# Altium PCB STM32_DAQ_Control_Board.PcbDoc (part 1 of 2)
Units mm, origin at the board's own origin, x right, y up, seen from the top; angles counter-clockwise.
Board outline 59.56 x 60 mm, 2 copper layers (Top Layer, Bottom Layer); 78 components, 52 nets, 252 pads, 265 vias.
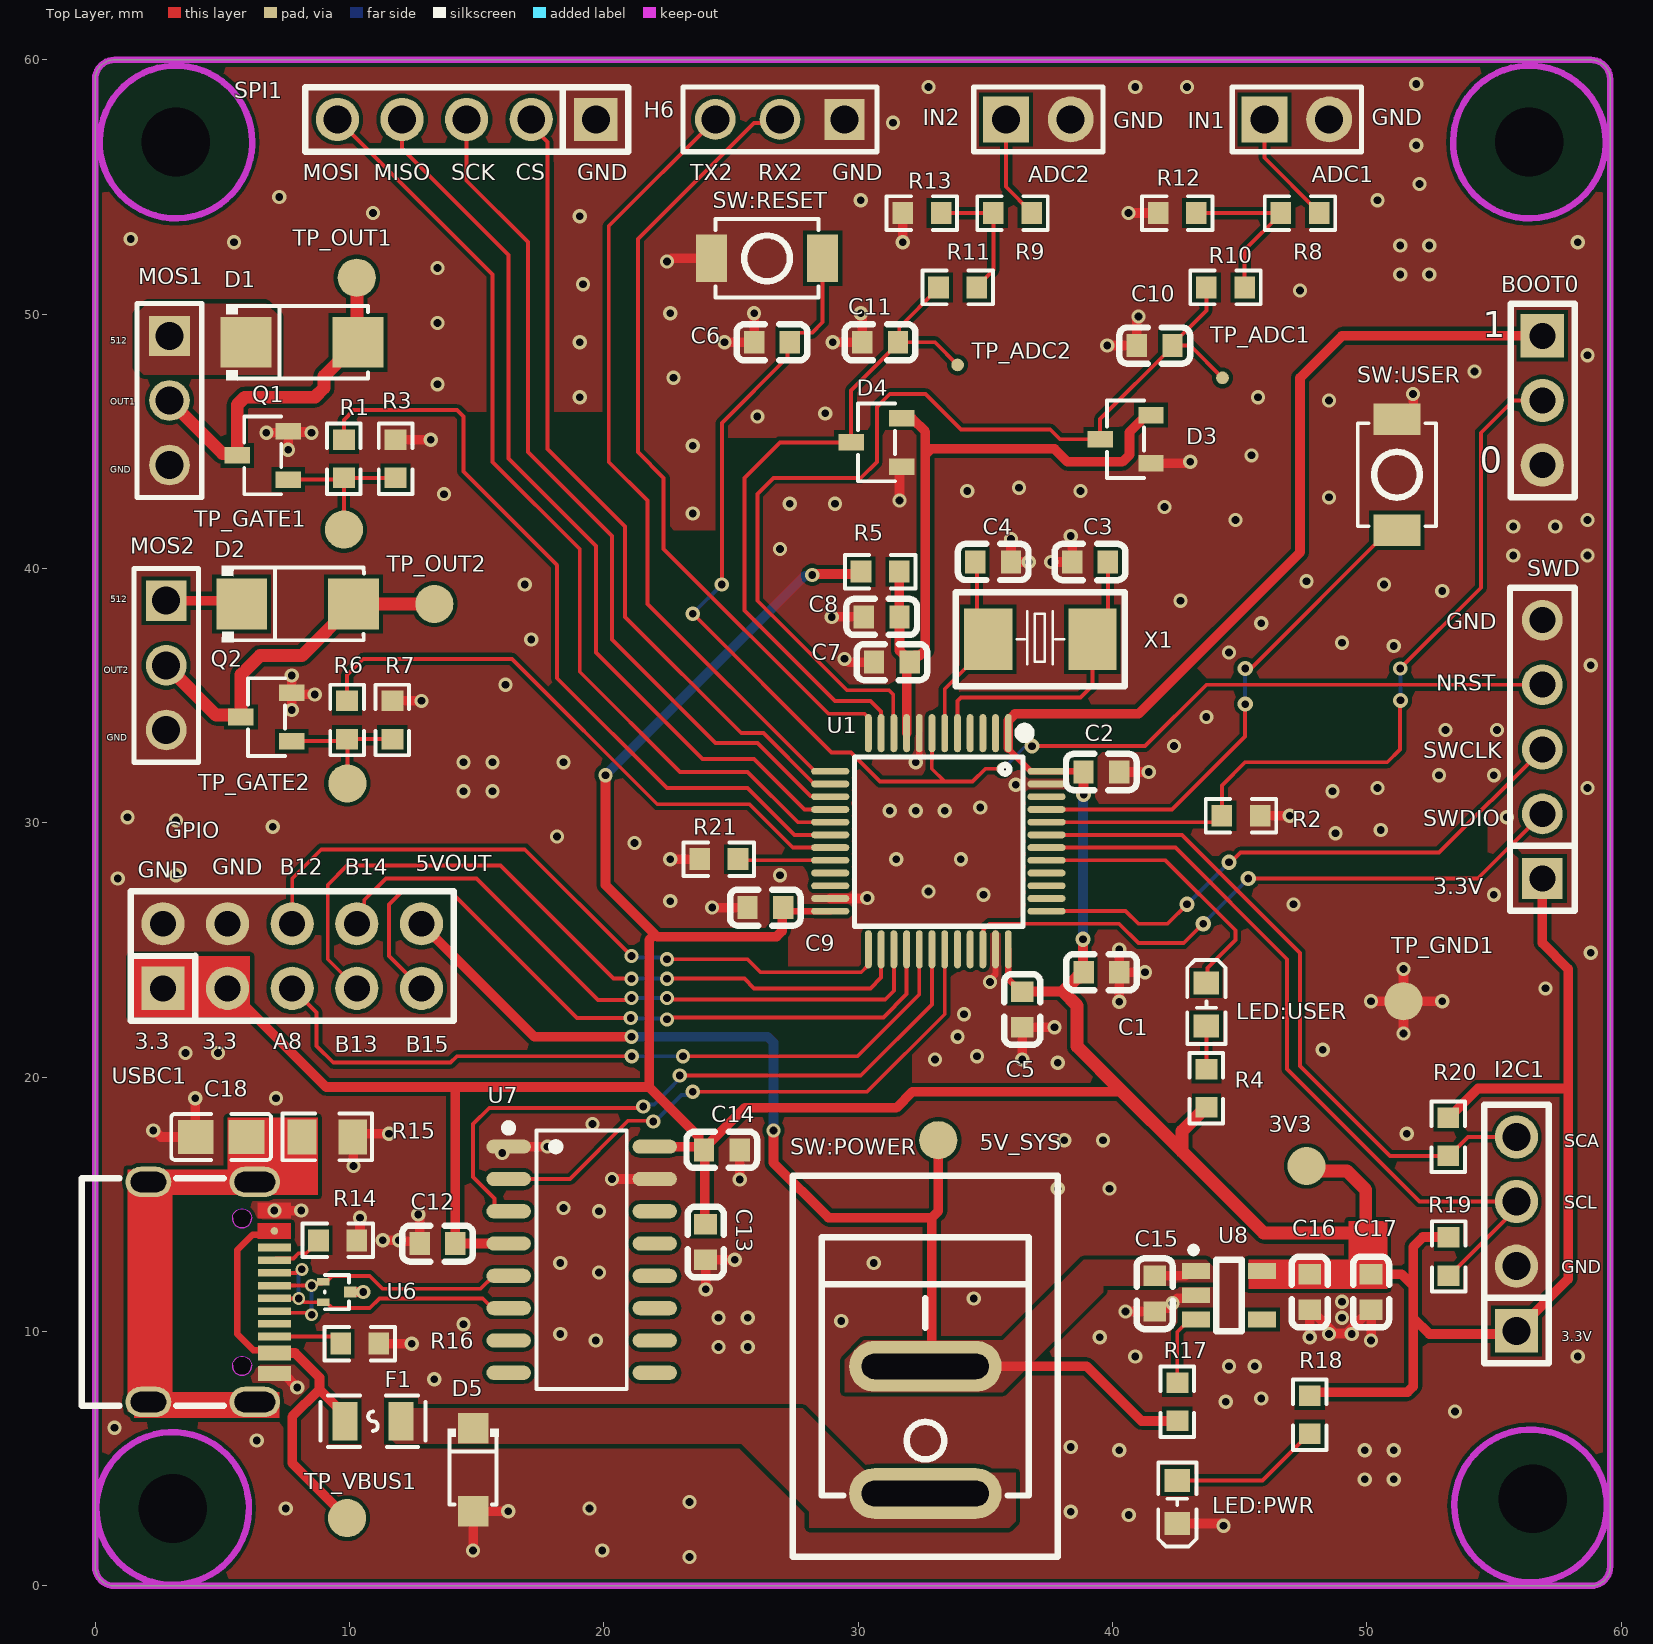
[diagram p0: Top Layer view]
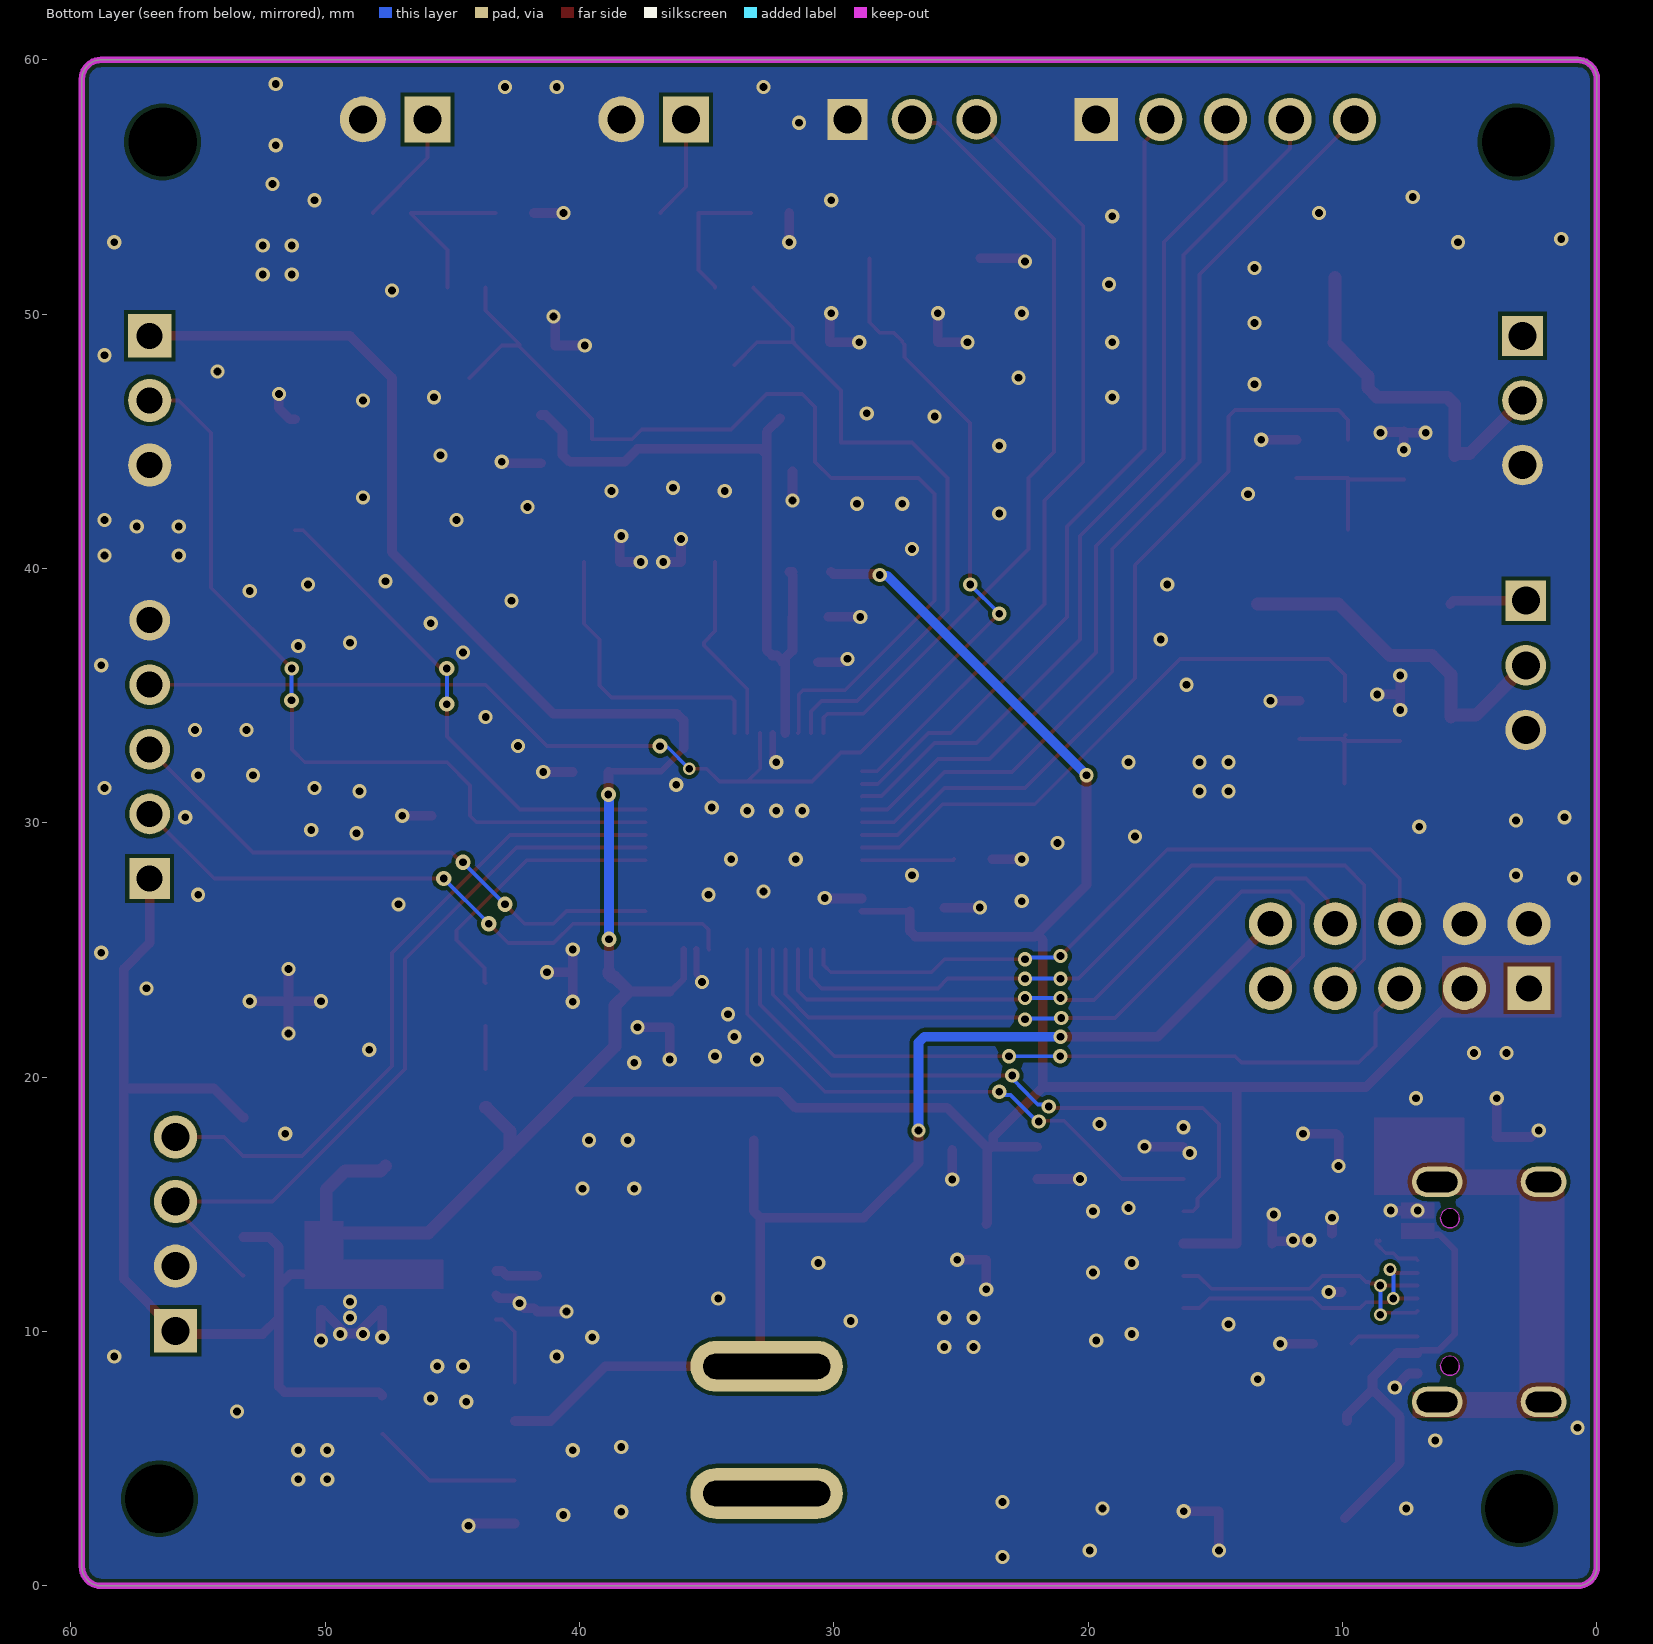
[diagram p1: Bottom Layer view, seen from below]

## Layer stack, top to bottom
Top Solder: solder mask 0.0102, Solder Resist, Dk 3.5
Top Layer: signal copper 0.0356
Dielectric 1: dielectric 0.32, FR-4, Dk 4.8
Bottom Layer: signal copper 0.0356
Bottom Solder: solder mask 0.0102, Solder Resist, Dk 3.5

## Board outline
0,0.762 0,59.238 cw(c0.762,59.238) 0.762,60 58.801,60 cw(c58.801,59.238) 59.563,59.238 59.563,0.762 cw(c58.801,0.762) 58.801,0 0.762,0 cw(c0.762,0.762)

## Design rules (kind name [scope] priority, off if disabled: settings)
Clearance [All] p1: gap=0.152 ignorepadtopadclearanceinfootprint=TRUE
HoleSize [All] p1: absolutevalues=TRUE maxlimit=6.3 minlimit=0.3 maxpercent=80.000 minpercent=20.000
HoleToHoleClearance HoleHole_ViaVia [IsVia vs IsVia] p1: gap=0.254 allowstackedmicrovias=TRUE
HoleToHoleClearance HoleHole_Default [All] p2: gap=0.457 allowstackedmicrovias=TRUE
MinimumSolderMaskSliver [All] p1: minsoldermaskwidth=0.102
NetAntennae [All] p1: netantennaetolerance=2.54
PlaneConnect [All] p1: planeconnectstyle=Direct reliefexpansion=0.508 reliefentries=4 reliefconductorwidth=0.254 reliefairgap=0.254
PolygonConnect [IsPad OR IsVia] p1: connectstyle=Direct reliefconductorwidth=0.254 reliefentries=4 polygonreliefangle="90 Angle" airgapwidth=0.203
RoutingVias [All] p1: holewidth=0.3 width=0.6 viastyle="Through Hole" minholewidth=0.3 minwidth=0.4 maxholewidth=5 maxwidth=5
SilkToSilkClearance [All] p1: silktosilkclearance=0.051
SilkToSolderMaskClearance [IsPad] p1: minsilkscreentomaskgap=0.152 clearancetoexposedcopper=TRUE
SolderMaskExpansion SolderMask_Via_Tented [IsVia] p1: expansion=0.102 istentingtop=TRUE
SolderMaskExpansion [All] p2: expansion=0.102 istentingtop=FALSE useseparateexpansions=TRUE expansionbottom=0.102 istentingbottom=FALSE
Width PWR [InNetClass('PWR')] p1: maxlimit=1.524 minlimit=0.254 preferedwidth=0.381 minimp=50.000000 maximp=50.000000 favimp=50.000000
Width [All] p2: maxlimit=2.54 minlimit=0.127 preferedwidth=0.152 minimp=50.000000 maximp=50.000000 favimp=50.000000
23 further rules are at their usual default settings.

## Components (designator, comment, footprint, x,y, rotation, side; value= is the part's Value field where it differs from the comment)
3V3 "" Test-Point-0.5mm#1 47.625,16.51 r90 top (schematic designator TP_2)
5V_SYS "" Test-Point-0.5mm#1 33.147,17.526 r90 top (schematic designator TP_1)
ADC1 "HX PZ2.54-1x2P ZZ" HDR-TH_2P-P2.54-V-M-3 47.244,57.658 r0 top (schematic designator U2)
ADC2 "HX PZ2.54-1x2P ZZ" HDR-TH_2P-P2.54-V-M-3 37.084,57.658 r0 top (schematic designator U3)
BOOT0 "HX PZ2.54-1x3P ZZ" CONN-TH_HX-PZ2.54-1X3P-ZZ 56.896,46.609 r270 top (schematic designator H2)
C1 "4.7uf" C0603 39.563,24.13 r180 top
C2 "100nF" C0603 39.558,32.004 r0 top
C3 "5.1pF" C0603 39.116,40.259 r0 top value=10pf
C4 "5.1pF" C0603 35.306,40.259 r180 top value=10pf
C5 "100nF" C0603 36.449,22.667 r270 top
C6 "100nF" C0603 26.609,48.895 r0 top
C7 "100nf" C0603 31.323,36.322 r0 top
C8 "1uf" C0603 30.922,38.1 r0 top
C9 "100nF" C0603 26.35,26.67 r0 top
C10 "10nF" C0603 41.656,48.768 r0 top
C11 "10nF" C0603 30.861,48.895 r0 top
C12 "100nF" C0603 13.462,13.462 r0 top
C13 "1uf" C0603 24.003,13.523 r90 top
C14 "100nF" C0603 24.638,17.145 r180 top
C15 "1uf" C0603 41.656,11.491 r270 top
C16 "1uf" C0603 47.752,11.557 r270 top
C17 "4.7uf" C0603 50.165,11.557 r270 top
C18 "1nF" C0805 4.953,17.653 r0 top
D1 "SS14" SMA_L4.3-W2.6-LS5.2-RD 8.128,48.895 r0 top
D2 "SS14" SMA_L4.3-W2.6-LS5.2-RD 7.96,38.608 r0 top
D3 "BAT54S" SOT-23-3_L2.9-W1.3-P1.90-LS2.4-BR 40.513,45.085 r0 top
D4 "BAT54S" SOT-23-3_L2.9-W1.3-P1.90-LS2.4-BR 30.719,44.958 r0 top
D5 "SMF5.0A" SOD-123FL_L2.7-W1.8-LS3.8-RD 14.859,4.572 r270 top
F1 "SMD0805-050-6" F0805 10.922,6.477 r180 top
GPIO "PZ2.54-2X5P-H25" HDR-TH_10P-P2.54-V-M-R2-C5-S2.54_2 7.747,24.765 r0 top (schematic designator H5)
H6 "2.54-1*3P针" HDR-TH_3P-P2.54-V-M-1 26.924,57.658 r180 top
I2C1 "HX PZ2.54-1x4P" HDR-TH_4P-P2.54-V-M 55.88,13.843 r90 top (schematic designator U5)
LED:PWR "GL0603UR01" LED0603-FD 42.545,3.302 r270 top (schematic designator LED2)
LED:USER "GL0603UR01" LED0603-FD 43.688,22.86 r90 top (schematic designator LED1)
MOS1 "2.54-1*3P针" HDR-TH_3P-P2.54-V-M-1 2.921,46.609 r270 top (schematic designator H1)
MOS2 "2.54-1*3P针" HDR-TH_3P-P2.54-V-M-1 2.794,36.195 r270 top (schematic designator H3)
Q1 "AO3400A" SOT-23-3_L2.9-W1.3-P1.90-LS2.4-BR 6.589,44.45 r0 top
Q2 "AO3400A" SOT-23-3_L2.9-W1.3-P1.90-LS2.4-BR 6.731,34.163 r0 top
R1 "100欧" R0603 9.779,44.315 r270 top
R2 "10K" R0603 45.049,30.282 r0 top
R3 "100k" R0603 11.811,44.315 r270 top
R4 "1k" R0603 43.688,19.568 r270 top value=10K
R5 "0欧" R0603 30.861,39.878 r0 top
R6 "100欧" R0603 9.906,34.046 r270 top
R7 "100k" R0603 11.684,34.046 r270 top
R8 "12K" R0603 47.371,53.975 r180 top value=10K
R9 "12K" R0603 36.068,53.975 r180 top value=10K
R10 "330欧" R0603 44.44,51.054 r0 top
R11 "330欧" R0603 33.909,51.054 r0 top
R12 "18K" R0603 42.545,53.975 r180 top
R13 "18K" R0603 32.504,53.975 r180 top
R14 "5.1k" R0603 9.535,13.589 r180 top
R15 "1MΩ" R0805 9.129,17.653 r180 top
R16 "5.1k" R0603 10.406,9.525 r180 top
R17 "10K" R0603 42.545,7.239 r90 top
R18 "1K" R0603 47.752,6.731 r90 top
R19 "4.7k" R0603 53.213,12.954 r90 top value=0欧
R20 "4.7k" R0603 53.198,17.661 r90 top value=0欧
R21 "10K" R0603 24.519,28.575 r0 top value=0欧
SPI1 "HX PZ2.54-1x5P" HDR-TH_5P-P2.54-V-M 14.605,57.658 r180 top (schematic designator U4)
SW:POWER "RS601HL-1010011BB" SW-TH_RS601HL-1010011BB 32.639,6.137 r90 top (schematic designator SW3)
SW:RESET "TS-1088-AR02016" SW-SMD_L3.9-W3.0-P4.45 26.416,52.197 r0 top (schematic designator SW2)
SW:USER "TS-1088-AR02016" SW-SMD_L3.9-W3.0-P4.45 51.181,43.688 r90 top (schematic designator SW1)
SWD "PH2.54-1X5P-H25" HDR-TH_5P-P2.54-V-M-3 56.896,32.893 r90 top (schematic designator H4)
TP_ADC1 "" Test-Point-0.5mm#2 44.323,47.498 r90 top
TP_ADC2 "" Test-Point-0.5mm#2 33.909,48.006 r90 top
TP_GATE1 "" Test-Point-0.5mm#1 9.779,41.529 r90 top
TP_GATE2 "" Test-Point-0.5mm#1 9.915,31.553 r90 top
TP_GND1 "" Test-Point-0.5mm#1 51.435,22.987 r90 top
TP_OUT1 "" Test-Point-0.5mm#1 10.287,51.435 r90 top
TP_OUT2 "" Test-Point-0.5mm#1 13.335,38.608 r90 top
TP_VBUS1 "" Test-Point-0.5mm#1 9.906,2.667 r90 top
U1 "STM32F103C8T6" LQFP-48_L7.0-W7.0-P0.50-LS9.0-BL 33.152,29.279 r180 top
U6 "TPD2EUSB30DRTR-N" SOT-723_L1.2-W0.8-P0.40-LS1.2-BR 9.505,11.557 r180 top
U7 "CH340C" SOP-16_L10.0-W3.9-P1.27-LS6.0-BL 19.129,12.827 r270 top
U8 "AP2112K-3.3TRG1" SOT-25-5_L2.9-W1.6-P0.95-LS2.8-BL 44.577,11.43 r270 top
USBC1 "TYPE-C-31-M-12" USB-C_SMD-TYPE-C-31-M-12_1 4.572,11.557 r270 top
X1 "8MHz" CRYSTAL-SMD_L5.0-W3.2 37.16,37.221 r180 top

## Footprints (in the part's own frame and the unit in brackets; to place one, negate y for a bottom-side part, rotate by r counter-clockwise, add the part's x,y. Pads: shape width x height; smd on the part's side, far side on the other; paste and mask are expansions set on the pad)
C0603 [mil]
  rect 31.5x35.4 smd: 1(-27.6,0) 2(27.6,0)
  silkscreen extent -55,-28 55,28
C0805 [mil]
  rect 55.5x53.1 smd paste-3937 mask+2: 1(-39.4,0) 2(39.3,0)
  silkscreen extent -77,-36 77,36
CONN-TH_HX-PZ2.54-1X3P-ZZ [mm]
  rect 1.699x1.699 hole 1.021: 1(-2.54,0)
  round 1.699 hole 1.021: 2(0,0) 3(2.54,0)
  silkscreen extent -3.81,-1.25 3.81,1.27
CRYSTAL-SMD_L5.0-W3.2 [mil]
  rect 74.8x94.5 smd: 1(-80.7,0) 2(80.7,0)
  silkscreen extent -131,-73 131,73
F0805 [mm]
  rect 1.001x1.501 smd paste-100 mask+0.051: 1(-1.102,0) 2(1.1,0)
  silkscreen extent -2.06,-1.02 2.06,1.02
HDR-TH_2P-P2.54-V-M-3 [mm]
  rect 1.801x1.801 hole 1.1: 1(-1.27,0)
  round 1.801 hole 1.1: 2(1.27,0)
  silkscreen extent -2.54,-1.27 2.54,1.27
HDR-TH_3P-P2.54-V-M-1 [mil]
  rect 62x63 hole 43.3 paste-99999 mask+2: 1(-100,0)
  round 63 hole 43.3 paste-99999 mask+2: 2(0,0) 3(100,0)
  silkscreen extent -150,-50 150,50
HDR-TH_4P-P2.54-V-M [mm]
  rect 1.699x1.699 hole 1.1: 1(-3.81,0)
  round 1.699 hole 1.1: 2(-1.27,0) 3(1.27,0) 4(3.81,0)
  silkscreen extent -5.08,-1.27 5.08,1.27
HDR-TH_5P-P2.54-V-M [mm]
  rect 1.699x1.699 hole 1.1: 1(-5.08,0)
  round 1.699 hole 1.1: 2(-2.54,0) 3(0,0) 4(2.54,0) 5(5.08,0)
  silkscreen extent -6.35,-1.27 6.35,1.27
HDR-TH_5P-P2.54-V-M-3 [mil]
  rect 63x63 hole 40.2: 1(-200,0)
  round 63 hole 40.2: 2(-100,0) 3(0,0) 4(100,0) 5(200,0)
  silkscreen extent -250,-50 250,50
HDR-TH_10P-P2.54-V-M-R2-C5-S2.54_2 [mm]
  rect 1.699x1.699 hole 1.021: 1(-5.08,-1.27)
  round 1.699 hole 1.021: 2(-5.08,1.27) 3(-2.54,-1.27) 4(-2.54,1.27) 5(0,-1.27) 6(0,1.27) 7(2.54,-1.27) 8(2.54,1.27) 9(5.08,-1.27) 10(5.08,1.27)
  silkscreen extent -6.35,-2.54 6.35,2.54
LED0603-FD [mil]
  rect 35.4x39.4 smd: 1(-33.5,0) 2(33.4,0)
  silkscreen extent -61,-30 69,30
LQFP-48_L7.0-W7.0-P0.50-LS9.0-BL [mil]
  oval 10.6x59.1 smd paste+0 mask+2: 1(-108.2,-167.3) 2(-88.5,-167.3) 3(-68.9,-167.3) 4(-49.2,-167.3) 5(-29.5,-167.3) 6(-9.8,-167.3) 7(9.9,-167.3) 8(29.6,-167.3) 9(49.2,-167.3) 10(68.9,-167.3) 11(88.6,-167.3) 12(108.3,-167.3) 25(108.3,167.3) 26(88.6,167.3) 27(68.9,167.3) 28(49.2,167.3) 29(29.6,167.3) 30(9.9,167.3) 31(-9.8,167.3) 32(-29.5,167.3) 33(-49.2,167.3) 34(-68.9,167.3) 35(-88.5,167.3) 36(-108.2,167.3)
  oval 59.1x10.6 smd paste+0 mask+2: 13(167.4,-108.3) 14(167.4,-88.6) 15(167.4,-68.9) 16(167.4,-49.2) 17(167.4,-29.5) 18(167.4,-9.9) 19(167.4,9.8) 20(167.4,29.5) 21(167.4,49.2) 22(167.4,68.9) 23(167.4,88.6) 24(167.4,108.3) 37(-167.3,108.3) 38(-167.3,88.6) 39(-167.3,68.9) 40(-167.3,49.2) 41(-167.3,29.5) 42(-167.3,9.8) 43(-167.3,-9.9) 44(-167.3,-29.5) 45(-167.3,-49.2) 46(-167.3,-68.9) 47(-167.3,-88.6) 48(-167.3,-108.3)
  silkscreen extent -141,-176 130,132
R0603 [mil]
  rect 31.8x34 smd paste-3937 mask+2: 1(-29.6,0) 2(29.7,0)
  silkscreen extent -55,-26 55,26
R0805 [mm]
  rect 1.133x1.377 smd paste-100 mask+0.051: 1(-0.998,0) 2(1.001,0)
  silkscreen extent -1.76,-0.92 1.76,0.92
SMA_L4.3-W2.6-LS5.2-RD [mm]
  rect 1.999x1.999 smd: 1(-2.2,0) 2(2.2,0)
  silkscreen extent -2.98,-1.5 2.6,1.5
SOD-123FL_L2.7-W1.8-LS3.8-RD [mm]
  rect 1.199x1.199 smd: 1(-1.633,0) 2(1.636,0)
  silkscreen extent -1.61,-1 1.38,1
SOP-16_L10.0-W3.9-P1.27-LS6.0-BL [mm]
  oval 0.559x1.745 smd: 1(-4.445,-2.873) 2(-3.175,-2.873) 3(-1.905,-2.873) 4(-0.635,-2.873) 5(0.635,-2.873) 6(1.905,-2.873) 7(3.175,-2.873) 8(4.445,-2.873) 9(4.445,2.873) 10(3.175,2.873) 11(1.905,2.873) 12(0.635,2.873) 13(-0.635,2.873) 14(-1.905,2.873) 15(-3.175,2.873) 16(-4.445,2.873)
  silkscreen extent -5.33,-3.02 5.08,1.77
SOT-23-3_L2.9-W1.3-P1.90-LS2.4-BR [mm]
  rect 1.001x0.65 smd: 1(0.998,-0.95) 2(0.998,0.95) 3(-1.001,0)
  silkscreen extent -0.73,-1.53 0.73,1.53
SOT-25-5_L2.9-W1.6-P0.95-LS2.8-BL [mil]
  rect 24.5x43.5 smd: 1(-37.4,-51.2) 2(0,-51.2) 3(37.4,-51.2) 4(37.4,51.2) 5(-37.4,51.2)
  silkscreen extent -75,-60 56,20
SOT-723_L1.2-W0.8-P0.40-LS1.2-BR [mm]
  rect 0.49x0.295 smd: 1(0.531,-0.399) 2(0.531,0.401)
  rect 0.49x0.434 smd: 3(-0.528,0)
  silkscreen extent -0.47,-0.68 0.48,0.68
SW-SMD_L3.9-W3.0-P4.45 [mil]
  rect 48.4x73.2 smd: 1(-86,0) 2(86,0)
  silkscreen extent -80,-61 80,61
SW-TH_RS601HL-1010011BB [mil]
  oval 78.7x236.2 hole 39.4 slot 196.8 at 90 deg paste-99999 mask+2: 1(-98.5,0) 2(98.4,0)
  silkscreen extent -197,-205 393,205
Test-Point-0.5mm#1 [mm]
  round 1.5 smd: 1(0,0)
Test-Point-0.5mm#2 [mm]
  round 0.5 smd: 1(0,0)
USB-C_SMD-TYPE-C-31-M-12_1 [mil]
  oval 47.2x78.7 hole 31.5 slot 63 at 90 deg: 1(170.2,67.1) 4(-170.3,67.1)
  oval 47.2x70.9 hole 31.5 slot 55.1 at 90 deg: 2(170.2,-97.5) 3(-170.3,-97.5)
  round 11.8 smd: A1B12(-126,97.4) A4B9(-94.5,97.4)
  rect 11.8x51.2 smd paste-3937 mask+2: A5(-49.2,97.4) A6(-9.9,97.4) A7(9.8,97.4) A8(49.2,97.4) B5(68.9,97.4) B6(29.5,97.4) B7(-29.6,97.4) B8(-68.9,97.4)
  rect 23.6x51.2 smd paste-3937 mask+2: B1A12(126,97.4) B4A9(94.5,97.4)
  Top Layer region: -114.2,71.8 -114.2,123 -126,123 -126,122.9 -137.8,122.9 -137.8,71.8 -126,71.8 -126,71.8 -114.2,71.8
  Top Layer region: -82.7,71.8 -82.7,122.9 -94.5,122.9 -94.5,122.9 -106.3,122.9 -106.3,71.8 -94.5,71.8 -94.5,71.8 -82.7,71.8
  Keep-Out Layer board cut-out: -99.4,47.4 -99.8,44 -101,40.8 -102.9,37.9 -105.4,35.6 -108.4,33.9 -111.6,32.9 -115.1,32.7 -118.4,33.3 -121.6,34.6 -124.3,36.7 -126.5,39.3 -128.1,42.4 -128.9,45.7 -128.9,49.1 -128.1,52.5 -126.5,55.5 -124.3,58.2 -121.6,60.2 -118.4,61.6 -115.1,62.2 -111.6,62 -108.4,61 -105.4,59.3 -102.9,56.9 -101,54 -99.8,50.8 -99.4,47.4
  Keep-Out Layer board cut-out: 128.9,47.4 128.5,44 127.3,40.8 125.5,37.9 123,35.6 120,33.9 116.7,32.9 113.3,32.7 109.9,33.3 106.8,34.6 104,36.7 101.8,39.3 100.3,42.4 99.5,45.7 99.5,49.1 100.3,52.5 101.8,55.5 104,58.2 106.8,60.2 109.9,61.6 113.3,62.2 116.7,62 120,61 123,59.3 125.5,56.9 127.3,54 128.5,50.8 128.9,47.4
  Keep-Out Layer region: -99.4,47.4 -99.8,44 -101,40.8 -102.9,37.9 -105.4,35.6 -108.4,33.9 -111.6,32.9 -115.1,32.7 -118.4,33.3 -121.6,34.6 -124.3,36.7 -126.5,39.3 -128.1,42.4 -128.9,45.7 -128.9,49.1 -128.1,52.5 -126.5,55.5 -124.3,58.2 -121.6,60.2 -118.4,61.6 -115.1,62.2 -111.6,62 -108.4,61 -105.4,59.3 -102.9,56.9 -101,54 -99.8,50.8 -99.4,47.4
  Keep-Out Layer region: -99.4,47.4 -99.8,44 -101,40.8 -102.9,37.9 -105.4,35.6 -108.4,33.9 -111.6,32.9 -115.1,32.7 -118.4,33.3 -121.6,34.6 -124.3,36.7 -126.5,39.3 -128.1,42.4 -128.9,45.7 -128.9,49.1 -128.1,52.5 -126.5,55.5 -124.3,58.2 -121.6,60.2 -118.4,61.6 -115.1,62.2 -111.6,62 -108.4,61 -105.4,59.3 -102.9,56.9 -101,54 -99.8,50.8 -99.4,47.4
  Keep-Out Layer region: 128.9,47.4 128.5,44 127.3,40.8 125.5,37.9 123,35.6 120,33.9 116.7,32.9 113.3,32.7 109.9,33.3 106.8,34.6 104,36.7 101.8,39.3 100.3,42.4 99.5,45.7 99.5,49.1 100.3,52.5 101.8,55.5 104,58.2 106.8,60.2 109.9,61.6 113.3,62.2 116.7,62 120,61 123,59.3 125.5,56.9 127.3,54 128.5,50.8 128.9,47.4
  Keep-Out Layer region: 128.9,47.4 128.5,44 127.3,40.8 125.5,37.9 123,35.6 120,33.9 116.7,32.9 113.3,32.7 109.9,33.3 106.8,34.6 104,36.7 101.8,39.3 100.3,42.4 99.5,45.7 99.5,49.1 100.3,52.5 101.8,55.5 104,58.2 106.8,60.2 109.9,61.6 113.3,62.2 116.7,62 120,61 123,59.3 125.5,56.9 127.3,54 128.5,50.8 128.9,47.4
  Keep-Out Layer lines w0.1: 113.3,32.7 116.7,32.9 120,33.9 123,35.6 125.5,37.9 127.3,40.8 128.5,44 128.9,47.4 128.5,50.8 127.3,54 125.5,56.9 123,59.3 120,61 116.7,62 113.3,62.2 109.9,61.6 106.8,60.2 104,58.2 101.8,55.5 100.3,52.5 99.5,49.1 99.5,45.7 100.3,42.4 101.8,39.3 104,36.7 106.8,34.6 109.9,33.3 113.3,32.7 ; -115.1,32.7 -111.6,32.9 -108.4,33.9 -105.4,35.6 -102.9,37.9 -101,40.8 -99.8,44 -99.4,47.4 -99.8,50.8 -101,54 -102.9,56.9 -105.4,59.3 -108.4,61 -111.6,62 -115.1,62.2 -118.4,61.6 -121.6,60.2 -124.3,58.2 -126.5,55.5 -128.1,52.5 -128.9,49.1 -128.9,45.7 -128.1,42.4 -126.5,39.3 -124.3,36.7 -121.6,34.6 -118.4,33.3 -115.1,32.7
  silkscreen extent -176,-201 176,19

## Part data
3V3 5V_SYS TP_ADC1 TP_ADC2 TP_GATE1 TP_GATE2 TP_GND1 TP_OUT1 TP_OUT2 TP_VBUS1: library part Test-Point, "Test Point 测试点", AddInBom=yes, ConvertToPcb=yes, Device=Test-Point, FootprintName=Test-Point-0.5mm, Symbol=Test-Point
ADC1 ADC2: "插针结构:1x2P;间距:2.54mm;行距:-;圆针/方针:方针;安装方式:直插;排数:单排;总PIN位数:2P;额定电流:3A;额定电压:1kV;配合针长度:6mm;塑高:2.5mm;端接针长度:3mm;触头材质:黄铜;触头镀层:金;工作温度:-40℃~+105℃;颜色:黑色;", Color=黑色, Current Rating=3A, JLCPCB Part Class="Extended Part", LCSC Part Name="1x2P 间距:2.54mm 方针 直插", Manufacturer=hanxia(韩下), Operating Temperature=-40℃~+105℃, Voltage Rating (Max)=1kV, AddInBom=yes, Circluar Pins/Square Pins=方针, Contact Material=黄铜, Contact Plating=金, ConvertToPcb=yes, Datasheet=https://item.szlcsc.com/datasheet/HX%2520PZ2.54-1x2P%2520ZZ/34444548.html, Device="HX PZ2.54-1x2P ZZ", FootprintName=HDR-TH_2P-P2.54-V-M-3, Insulation Height=2.5mm, Length of End Connection Pin=3mm, Length of Mating Pin=6mm, ManufacturerPart="HX PZ2.54-1x2P ZZ", ModelId=c7a9f3c3e6e34627af2bf939e464cb35聨0819f05c4eef4c71ace90d822a990e87, ModelName=HDR-TH_2P-P2.54-M-LI-1X2P, ModelTransform=200,100,0,0,0,0,0,0,-118.11, Mounting Type=直插, Number of Pins=2P, Number of Rows=单排, Pin Structure=1x2P, Pitch=2.54mm, Row Spacing=-, Supplementary Features=-, Supplier=LCSC, Supplier Footprint=插件,P=2.54mm, SupplierPart=C32713268, Symbol="HX PZ2.54-1X2P ZZ"
BOOT0: "插针结构:1x3P;间距:2.54mm;行距:-;圆针/方针:方针;安装方式:直插;排数:单排;总PIN位数:3P;额定电流:3A;额定电压:1kV;配合针长度:6mm;塑高:2.5mm;端接针长度:3mm;触头材质:黄铜;触头镀层:金;工作温度:-40℃~+105℃;颜色:黑色;", Color=黑色, Current Rating=3A, JLCPCB Part Class="Extended Part", LCSC Part Name="1x3P 间距:2.54mm 方针 直插", Manufacturer=hanxia(韩下), Operating Temperature=-40℃~+105℃, Voltage Rating (Max)=1kV, AddInBom=yes, Circluar Pins/Square Pins=方针, Contact Material=黄铜, Contact Plating=金, ConvertToPcb=yes, Datasheet=https://item.szlcsc.com/datasheet/HX%2520PZ2.54-1x3P%2520ZZ/34444549.html, Device="HX PZ2.54-1x3P ZZ", FootprintName=CONN-TH_HX-PZ2.54-1X3P-ZZ, Insulation Height=2.5mm, Length of End Connection Pin=3mm, Length of Mating Pin=6mm, ManufacturerPart="HX PZ2.54-1x3P ZZ", ModelId=d100cf23e3504114ab0fced37a4e4a82聨0819f05c4eef4c71ace90d822a990e87, ModelName=CONN-TH_HX-PZ2.54-1X3P-ZZ, ModelTransform=292.5191,98.425,0,0,0,0,0,0,-118.11, Mounting Type=直插, Number of Pins=3P, Number of Rows=单排, Pin Structure=1x3P, Pitch=2.54mm, Row Spacing=-, Supplementary Features=-, Supplier=LCSC, Supplier Footprint=插件,P=2.54mm, SupplierPart=C32713269, Symbol="HX PZ2.54-1X3P ZZ"
C1 C2 C3 C4 C5 C6 C7 C8 C9 C10 C11 C12 C13 C14 C15 C16 C17: library part CAP_0603, AddInBom=yes, ConvertToPcb=yes, Device=CAP_0603, FootprintName=C0603, ModelName=C0603_L1.6-W0.8-H0.8, Supplier Footprint=0603, Symbol=Capacitance
  C1 C2 C3 C4 C5 C6 C7 C8 C9 C15 C16 C17: ModelId=ac125912035d415993ca9572d50418b1聨0819f05c4eef4c71ace90d822a990e87, ModelTransform=62.992,31.496,0,0,0,0,0,0,0
  C10 C11 C12 C13 C14: 3D Model=ac125912035d415993ca9572d50418b1聨0819f05c4eef4c71ace90d822a990e87, 3D Model Transform=62.992,31.496,0,0,0,0,0,0,0
C18: library part FCC0805B102K102FT, "容值:1nF;精度:±10%;额定电压:1kV;温度系数:X7R;", JLCPCB Part Class="Extended Part", LCSC Part Name="1nF ±10% 1kV", Manufacturer=FOJAN(富捷), Temperature Coefficient=X7R, Tolerance=±10%, Voltage Rating=1kV, AddInBom=yes, ConvertToPcb=yes, Datasheet=https://item.szlcsc.com/datasheet/FCC0805B102K102FT/5747097.html, Device=FCC0805B102K102FT, FootprintName=C0805, ManufacturerPart=FCC0805B102K102FT, ModelId=1ba041120af144c991958decab20d241聨0819f05c4eef4c71ace90d822a990e87, ModelName=C0805_L2.0-W1.3-H1.3, ModelTransform=78.74,51.181,0,0,0,0,0,0.0005,0, Supplier=LCSC, Supplier Footprint=0805, SupplierPart=C5137645, Symbol=FCC0805B102K102FT
D1 D2: library part SS14_C83852, "正向压降(Vf):500mV@1A;直流反向耐压(Vr):40V;整流电流:1A;", Current - Rectified=1A, JLCPCB Part Class="Extended Part", LCSC Part Name="电压:40V 电流:1A", Manufacturer=onsemi(安森美), Non-Repetitive Peak Forward Surge Current=40A, Operating Junction Temperature Range=-65℃~+125℃, Reverse Leakage Current (Ir)=200uA@40V, Voltage - DC Reverse(Vr)=40V, Voltage - Forward(Vf@If)=500mV@1A, AddInBom=yes, ConvertToPcb=yes, Datasheet=https://item.szlcsc.com/datasheet/SS14/85019.html, Device=SS14_C83852, FootprintName=SMA_L4.3-W2.6-LS5.2-RD, ManufacturerPart=SS14, ModelId=e3551acb3c5a4975a5e9d36087fe1fa2聨0819f05c4eef4c71ace90d822a990e87, ModelName=SMA_L4.3-W2.6-LS5.2-RD, ModelTransform=185.039,102.362,0,0,0,0,0,0,0, Supplier=LCSC, Supplier Footprint=SMA(DO-214AC), SupplierPart=C83852, Symbol=SS14_C83852
D3 D4: library part BAT54S_C7420333, "二极管配置:1对串联式;正向压降(Vf):400mV@10mA;直流反向耐压(Vr):30V;整流电流:200mA;", Current - Rectified=200mA, JLCPCB Part Class="Extended Part", LCSC Part Name="电压:30V 电流:200mA", Manufacturer=R+O(宏嘉诚), Non-Repetitive Peak Forward Surge Current=600mA, Reverse Leakage Current (Ir)=2uA@30V, Voltage - DC Reverse(Vr)=30V, Voltage - Forward(Vf@If)=400mV@10mA, AddInBom=yes, ConvertToPcb=yes, Datasheet=https://item.szlcsc.com/datasheet/BAT54S/8397155.html, Device=BAT54S_C7420333, Diode Configuration=1对串联式, FootprintName=SOT-23-3_L2.9-W1.3-P1.90-LS2.4-BR, ManufacturerPart=BAT54S, ModelId=c62791f0466c4ae2a892c056b845b0ca聨0819f05c4eef4c71ace90d822a990e87, ModelName=SOT-23-3P_L2.9-W1.3-H1.0-LS2.4-P0.95, ModelTransform=98.425,114.173,0,180,0,0,0.0005,-0.0005,0, Supplier=LCSC, Supplier Footprint=SOT-23, SupplierPart=C7420333, Symbol=BAT54S_C7420333
D5: library part SMF5.0A_C19077497, "极性:单向;反向截止电压(Vrwm):5V;钳位电压:9.2V;峰值脉冲电流(Ipp):21.7A@10/1000us;峰值脉冲功率(Ppp):200W@10/1000us;击穿电压:7V;", Clamping Voltage=9.2V, JLCPCB Part Class="Extended Part", Junction Capacitance=-, LCSC Part Name="单向TVS 5V截止 峰值浪涌电流：21.7A@10/1000us", Manufacturer=R+O(宏嘉诚), Operating Temperature=-55℃~+150℃, Peak Pulse Current (Ipp)=21.7A@10/1000us, Peak Pulse Power Dissipation (Ppp)=200W@10/1000us, Reverse Leakage Current (Ir)=400uA, Reverse Stand-Off Voltage (Vrwm)=5V, Voltage - Breakdown=7V, AddInBom=yes, ConvertToPcb=yes, Datasheet=https://item.szlcsc.com/datasheet/SMF5.0A/20275582.html, Device=SMF5.0A_C19077497, FootprintName=SOD-123FL_L2.7-W1.8-LS3.8-RD, level of protection="IEC 61000-4-2", ManufacturerPart=SMF5.0A, ModelId=86f9151e155e4fe2af0c4f2e0a80302e聨0819f05c4eef4c71ace90d822a990e87, ModelName=SOD-123FL_L2.8-W1.8-H1.1-LS3.6, ModelTransform=141.732,70.866,0,180,0,0,0,0,0, Number of Channels=单路, Polarity=单向, Supplier=LCSC, Supplier Footprint=SOD-123FL, SupplierPart=C19077497, Symbol=SMF5.0A_C19077497, Type=TVS
F1: "耐压(Vmax):6V;最大电流(Imax):40A;保持电流(Ihold):500mA;跳闸电流(Itrip):1A;", Current - Max=40A, Hold Current=500mA, JLCPCB Part Class="Extended Part", LCSC Part Name="6V 500mA", Manufacturer=R+O(宏嘉诚), Operating Temperature=-40℃~+85℃, Power Dissipation=500mW, Resistance - Initial (Ri) (Min)=100mΩ, Resistance - Post Trip (R1) (Max)=850mΩ, Trip Current=1A, Voltage - Max=6V, AddInBom=yes, ConvertToPcb=yes, Datasheet=https://item.szlcsc.com/datasheet/SMD0805-050-6/48798689.html, Device=SMD0805-050-6, FootprintName=F0805, Height=0.8mm, Length=2.2mm, ManufacturerPart=SMD0805-050-6, ModelId=57e2aa106f9143e8b6ab832aebb31c78聨0819f05c4eef4c71ace90d822a990e87, ModelName=F0805_L2.1-W1.4-H0.8, ModelTransform=82.677,55.118,0,0,0,0,0.0005,0,0, Supplier=LCSC, Supplier Footprint=0805, SupplierPart=C46640983, Symbol=SMD0805-050-6, Time to Trip(Max)=100ms, Width=1.5mm
GPIO: "插针结构:2x5P;间距:2.54mm;行距:2.54mm;圆针/方针:方针;安装方式:直插;排数:双排;总PIN位数:10P;额定电流:3A;额定电压:-;配合针长度:6mm;塑高:2.5mm;端接针长度:3mm;触头材质:黄铜;触头镀层:金;工作温度:-40℃~+105℃;颜色:黑色;", Color=黑色, Current Rating=3A, JLCPCB Part Class="Extended Part", LCSC Part Name="2x5P 间距:2.54mm 方针 直插", Manufacturer=JXTCONN(聚兴泰), Operating Temperature=-40℃~+105℃, Voltage Rating (Max)=-, AddInBom=yes, Circluar Pins/Square Pins=方针, Contact Material=黄铜, Contact Plating=金, ConvertToPcb=yes, Datasheet=https://item.szlcsc.com/datasheet/PZ2.54-2X5P-H25/44458948.html, Device=PZ2.54-2X5P-H25, FootprintName=HDR-TH_10P-P2.54-V-M-R2-C5-S2.54_2, Insulation Height=2.5mm, Length of End Connection Pin=3mm, Length of Mating Pin=6mm, ManufacturerPart=PZ2.54-2X5P-H25, ModelId=06d0967b89884158823d1be712bed3d1聨0819f05c4eef4c71ace90d822a990e87, ModelName=HDR-TH_10P-P2.54-V-M-R2-C5-S2.54_2, ModelTransform=500.393,200,0,0,0,0,0,0,-196.85, Mounting Type=直插, Number of Pins=10P, Number of Rows=双排, Pin Structure=2x5P, Pitch=2.54mm, Row Spacing=2.54mm, Supplier=LCSC, Supplier Footprint=插件,P=2.54mm, SupplierPart=C42431818, Symbol=PZ2.54-2X5P-H25
H6 MOS1 MOS2: "插针结构:1x3P;间距:2.54mm;行距:-;圆针/方针:方针;安装方式:直插;排数:单排;总PIN位数:3P;额定电流:3A;额定电压:-;配合针长度:6mm;塑高:2.5mm;端接针长度:3mm;触头材质:黄铜;触头镀层:金;工作温度:-40℃~+105℃;颜色:黑色;", Color=黑色, Current Rating=3A, JLCPCB Part Class="Extended Part", LCSC Part Name="1x3P 间距:2.54mm 方针 直插", Manufacturer=BOOMELE(博穆精密), Operating Temperature=-40℃~+105℃, Voltage Rating (Max)=-, AddInBom=yes, Circluar Pins/Square Pins=方针, Contact Material=黄铜, Contact Plating=金, ConvertToPcb=yes, Datasheet=https://item.szlcsc.com/datasheet/2.54-1*3P%25E9%2592%2588/50265.html, Device=2.54-1*3P针, FootprintName=HDR-TH_3P-P2.54-V-M-1, Insulation Height=2.5mm, Length of End Connection Pin=3mm, Length of Mating Pin=6mm, ManufacturerPart=2.54-1*3P针, ModelId=94a8ffe137b6410295cb18cd3ffd99db聨0819f05c4eef4c71ace90d822a990e87, ModelName=HDR-M-2.54_1x3, ModelTransform=299.9994,100,0,0,0,0,0,0,-118.11, Mounting Type=直插, Number of Pins=3P, Number of Rows=单排, Pin Structure=1x3P, Pitch=2.54mm, Row Spacing=-, Supplier=LCSC, Supplier Footprint=插件,P=2.54mm, SupplierPart=C49257, Symbol=Header-Male-2.54_1x3
I2C1: library part "HX PZ2.54-1x4P ZZ", "插针结构:1x4P;间距:2.54mm;行距:-;圆针/方针:方针;安装方式:直插;排数:单排;总PIN位数:4P;额定电流:3A;额定电压:1kV;配合针长度:6mm;塑高:2.5mm;端接针长度:3mm;触头材质:黄铜;触头镀层:金;工作温度:-40℃~+105℃;颜色:黑色;", Color=黑色, Current Rating=3A, JLCPCB Part Class="Extended Part", LCSC Part Name="1x4P 间距:2.54mm 方针 直插", Manufacturer=hanxia(韩下), Operating Temperature=-40℃~+105℃, Voltage Rating (Max)=1kV, AddInBom=yes, Circluar Pins/Square Pins=方针, Contact Material=黄铜, Contact Plating=金, ConvertToPcb=yes, Datasheet=https://item.szlcsc.com/datasheet/HX%2520PZ2.54-1x4P%2520ZZ/34444550.html, Device="HX PZ2.54-1x4P ZZ", FootprintName=HDR-TH_4P-P2.54-V-M, Insulation Height=2.5mm, Length of End Connection Pin=3mm, Length of Mating Pin=6mm, ManufacturerPart="HX PZ2.54-1x4P ZZ", ModelId=112f4d05e8d64e99ab9a333894bea4f9聨0819f05c4eef4c71ace90d822a990e87, ModelName=HDR-TH_4P-P2.54-M-LI-1X4P, ModelTransform=399.999,104.7242,0,0,0,0,0,0,-118.11, Mounting Type=直插, Number of Pins=4P, Number of Rows=单排, Pin Structure=1x4P, Pitch=2.54mm, Row Spacing=-, Supplementary Features=-, Supplier=LCSC, Supplier Footprint=插件,P=2.54mm, SupplierPart=C32713270, Symbol="HX PZ2.54-1X4P ZZ"
LED:PWR LED:USER: "灯头类型:-;发光颜色:红色;正向压降(Vf):2.4V;功率:-;正向电流:20mA;波长:620nm~625nm;二极管配置:独立二极管;透镜颜色:无色透明透镜;色温:-;发光强度:120mcd;发光角度:120°;载带方式:正贴;工作温度:-40℃~+85℃;", Color Temperature=-, Forward Current=20mA, Illumination Color=红色, JLCPCB Part Class="Extended Part", LCSC Part Name="0603 红灯 高亮", Lens Color=无色透明透镜, Manufacturer="Guiguang light(桂光光电)", Operating Temperature=-40℃~+85℃, Voltage - Forward(Vf)=2.4V, AddInBom=yes, ConvertToPcb=yes, Datasheet=https://item.szlcsc.com/datasheet/GL0603UR01/54645988.html, Device=GL0603UR01, Diode Configuration=独立二极管, FootprintName=LED0603-FD, Lamp Holder Type=-, Luminous Intensity=120mcd, ManufacturerPart=GL0603UR01, ModelId=b57d6965da4c4e30afc1a994a1f136ae聨0819f05c4eef4c71ace90d822a990e87, ModelName=LED0603_Inf, ModelTransform=60,30,0,0,0,0,0,0,0, Mounting Style=正贴, Peak Wavelength=-, Power(Watts)=-, Supplier=LCSC, Supplier Footprint=0603, SupplierPart=C51933292, Symbol=GL0603UR01, Viewing Angle=120°, Wavelength - Dominant=620nm~625nm
Q1 Q2: library part AO3400A_C20917, "数量:-;漏源电压(Vdss):30V;连续漏极电流(Id):-;导通电阻(RDS(on)):48mΩ@2.5V;耗散功率(Pd):-;阈值电压(Vgs(th)):1.45V@250uA;", Current - Continuous Drain(Id)=-, Drain to Source Voltage=30V, Gate Threshold Voltage (Vgs(th))=1.45V@250uA, Input Capacitance(Ciss)=630pF@15V, JLCPCB Part Class="Basic Part", LCSC Part Name="1个N沟道 耐压:30V 电流:5.7A", Manufacturer=AOS, Operating Temperature=-55℃~+150℃@(Tj), AddInBom=yes, Configuration=-, ConvertToPcb=yes, Datasheet=https://item.szlcsc.com/datasheet/AO3400A/21629.html, Device=AO3400A_C20917, FootprintName=SOT-23-3_L2.9-W1.3-P1.90-LS2.4-BR, Gate Charge(Qg)=7nC@10V, ManufacturerPart=AO3400A, ModelId=c62791f0466c4ae2a892c056b845b0ca聨0819f05c4eef4c71ace90d822a990e87, ModelName=SOT-23-3P_L2.9-W1.3-H1.0-LS2.4-P0.95, ModelTransform=98.425,114.173,0,180,0,0,0.0005,-0.0005,0, Number=-, Output Capacitance(Coss)=-, Pd - Power Dissipation=-, RDS(on)=48mΩ@2.5V, Reverse Transfer Capacitance (Crss@Vds)=-, Supplier=LCSC, Supplier Footprint=SOT-23-3L, SupplierPart=C20917, Symbol=AO3400A, Type=N沟道
R1 R2 R3 R5 R6 R7 R8 R9 R10 R11 R12 R13 R14 R16 R17 R18 R19 R20 R21: library part Res_0603, AddInBom=yes, ConvertToPcb=yes, Device=Res_0603, FootprintName=R0603, ModelName=R0603, Supplier Footprint=0603, Symbol=电阻
  R1 R3 R6 R7 R8 R9 R10 R11 R12 R13: 3D Model=fc143cca1e79419f9cd78b61e9279f08聨0819f05c4eef4c71ace90d822a990e87, 3D Model Transform=31.8897,63.7794,0,90,0,0,0,0,0
  R2 R5 R14 R16 R17 R18 R19 R20 R21: ModelId=fc143cca1e79419f9cd78b61e9279f08聨0819f05c4eef4c71ace90d822a990e87, ModelTransform=31.8897,63.7794,0,90,0,0,0,0,0
R4: library part Res_0603_1, AddInBom=yes, ConvertToPcb=yes, Device=Res_0603, FootprintName=R0603, ModelId=fc143cca1e79419f9cd78b61e9279f08聨0819f05c4eef4c71ace90d822a990e87, ModelName=R0603, ModelTransform=31.8897,63.7794,0,90,0,0,0,0,0, Supplier Footprint=0603, Symbol=电阻
R15: library part FRC0805F1004TS, "电阻类型:厚膜电阻;阻值:1MΩ;精度:±1%;功率:125mW;工作电压:150V;温度系数:±100ppm/℃;", JLCPCB Part Class="Extended Part", LCSC Part Name="1MΩ ±1% 125mW 厚膜电阻", Manufacturer=FOJAN(富捷), Operating Temperature=-55℃~+155℃, Power(Watts)=125mW, Temperature Coefficient=±100ppm/℃, Tolerance=±1%, Voltage-Supply(Max)=150V, AddInBom=yes, ConvertToPcb=yes, Device=FRC0805F1004TS, FootprintName=R0805, ManufacturerPart=FRC0805F1004TS, ModelId=37a81e68749a4138bd2dfa6897b24b85聨0819f05c4eef4c71ace90d822a990e87, ModelName=R0805_L2.0-W1.3-H0.6, ModelTransform=78.74,51.181,0,0,0,0,0,-0.0005,0, Supplier=LCSC, Supplier Footprint=0805, SupplierPart=C2933280, Symbol=FRC0805F1004TS, Type=厚膜电阻
SPI1: library part "HX PZ2.54-1x5P ZZ", "插针结构:1x5P;间距:2.54mm;行距:-;圆针/方针:方针;安装方式:直插;排数:单排;总PIN位数:5P;额定电流:3A;额定电压:1kV;配合针长度:6mm;塑高:2.5mm;端接针长度:3mm;触头材质:黄铜;触头镀层:金;工作温度:-40℃~+105℃;颜色:黑色;", Color=黑色, Current Rating=3A, JLCPCB Part Class="Extended Part", LCSC Part Name="1x5P 间距:2.54mm 方针 直插", Manufacturer=hanxia(韩下), Operating Temperature=-40℃~+105℃, Voltage Rating (Max)=1kV, AddInBom=yes, Circluar Pins/Square Pins=方针, Contact Material=黄铜, Contact Plating=金, ConvertToPcb=yes, Datasheet=https://item.szlcsc.com/datasheet/HX%2520PZ2.54-1x5P%2520ZZ/34444551.html, Device="HX PZ2.54-1x5P ZZ", FootprintName=HDR-TH_5P-P2.54-V-M, Insulation Height=2.5mm, Length of End Connection Pin=3mm, Length of Mating Pin=6mm, ManufacturerPart="HX PZ2.54-1x5P ZZ", ModelId=47d466e4a34f4fc5bc626cf773a24dd5聨0819f05c4eef4c71ace90d822a990e87, ModelName=HDR-TH_5P-P2.54-M-LI-1X5P, ModelTransform=499.999,100,0,0,0,0,0,0,-118.11, Mounting Type=直插, Number of Pins=5P, Number of Rows=单排, Pin Structure=1x5P, Pitch=2.54mm, Row Spacing=-, Supplementary Features=-, Supplier=LCSC, Supplier Footprint=插件,P=2.54mm, SupplierPart=C32713271, Symbol="HX PZ2.54-1X5P ZZ"
SW:POWER: "带灯:无;引脚样式:焊片;额定电流:3A;额定电压(AC):250V;额定电压(DC):-;电路结构:单刀单掷;工作寿命:1万次;", Actuator Color=黑色, Current Rating=3A, JLCPCB Part Class="Extended Part", Manufacturer=HCTL(华灿天禄), Operating Temperature=-25℃~+85℃, Voltage Rating (AC)=250V, Voltage Rating (DC)=-, Actuator Identifier="- O", Actuator Type=凹面弯曲, AddInBom=yes, Circuit=单刀单掷, ConvertToPcb=yes, Datasheet=https://item.szlcsc.com/datasheet/RS601HL-1010011BB/3096684.html, Device=RS601HL-1010011BB, FootprintName=SW-TH_RS601HL-1010011BB, LCSC Part Name=RS601HL-1010011BB, Length=15mm, Life=1万次, ManufacturerPart=RS601HL-1010011BB, ModelId=cac6664e7827407e8024fa0ea95caa3c聨0819f05c4eef4c71ace90d822a990e87, ModelName=SW-TH_RS601HL-1010011BB, ModelTransform=590.55,413.385,0,0,0,0,97.83,0,-196.85, Supplier=LCSC, Supplier Footprint=插件,15x10.5mm, SupplierPart=C2885782, Switch Height=-, Symbol=RS601HL-1010011BB, Termination Style=焊片, Width=10.5mm, With Lamp=无
SW:RESET SW:USER: "电路结构:单刀单掷;按钮形状:圆形按钮;作用力:1.6N;安装方式:立贴;开关长度:3.9mm;开关宽度:3mm;开关高度:2mm;带支架:不带支架;触点电流:50mA;额定电压:12V;带灯:-;工作寿命:10万次;", Actuator/Cap Color=黑色, Contact Current=50mA, IP Rating=-, JLCPCB Part Class="Basic Part", LCSC Part Name="3.9*3*2mm 立贴 轻触开关", Manufacturer=XUNPU(讯普), Operating Force=1.6N, Operating Temperature=-30℃~+80℃, Voltage Rating=12V, Actuator Style=圆形按钮, AddInBom=yes, Circuit=单刀单掷, ConvertToPcb=yes, Datasheet=https://item.szlcsc.com/datasheet/TS-1088-AR02016/763484.html, Device=TS-1088-AR02016, FootprintName=SW-SMD_L3.9-W3.0-P4.45, Length=3.9mm, Life=10万次, ManufacturerPart=TS-1088-AR02016, ModelId=b26698b69f274ffabef8a26c7d0e5dd1聨0819f05c4eef4c71ace90d822a990e87, ModelName=SW-SMD_L3.9-W2.9-H2.0-LS4.8, ModelTransform=188.976,114.174,0,0,0,0,0,0,0, Mounting Type=立贴, Supplier=LCSC, Supplier Footprint=SMD,4x3mm, SupplierPart=C720477, Switch Height=2mm, Symbol=TS-1088-AR02016, Termination Style=SMD接片, Width=3mm, with Bracket=不带支架, With Lamp=-
SWD: "插针结构:1x5P;间距:2.54mm;行距:-;圆针/方针:方针;安装方式:直插;排数:单排;总PIN位数:5P;额定电流:3A;额定电压:-;配合针长度:6mm;塑高:2.5mm;端接针长度:3mm;触头材质:黄铜;触头镀层:金;工作温度:-40℃~+105℃;颜色:黑色;", Color=黑色, Current Rating=3A, JLCPCB Part Class="Extended Part", LCSC Part Name="1x5P 间距:2.54mm 方针 直插", Manufacturer=JXTCONN(聚兴泰), Operating Temperature=-40℃~+105℃, Voltage Rating (Max)=-, AddInBom=yes, Circluar Pins/Square Pins=方针, Contact Material=黄铜, Contact Plating=金, ConvertToPcb=yes, Datasheet=https://item.szlcsc.com/datasheet/PH2.54-1X5P-H25/44458965.html, Device=PH2.54-1X5P-H25, FootprintName=HDR-TH_5P-P2.54-V-M-3, Insulation Height=2.5mm, Length of End Connection Pin=3mm, Length of Mating Pin=6mm, ManufacturerPart=PH2.54-1X5P-H25, ModelId=70c2fce3a47c4ce6bc0418a805e76a28聨0819f05c4eef4c71ace90d822a990e87, ModelName=HDR-TH_5P-P2.54-V-M-3, ModelTransform=500.3927,98.425,0,0,0,0,0,0,-118.11, Mounting Type=直插, Number of Pins=5P, Number of Rows=单排, Pin Structure=1x5P, Pitch=2.54mm, Row Spacing=-, Supplier=LCSC, Supplier Footprint=插件,P=2.54mm, SupplierPart=C42431835, Symbol=PH2.54-1X5P-H25
U1: "CPU内核:ARM-M3;CPU最大主频:72MHz;应用领域:-;", JLCPCB Part Class="Extended Part", LCSC Part Name="主流增强型ARM Cortex-M3 MCU，具有64 KB Flash、72 MHz CPU、电机控制、USB和CAN", Manufacturer=ST(意法半导体), Voltage - Supply=2V~3.6V, ADC (Bit)=12bit, AddInBom=yes, Applications=-, ConvertToPcb=yes, CPU Core=ARM-M3, CPU Maximum Speed=72MHz, Datasheet=https://item.szlcsc.com/datasheet/STM32F103C8T6/9243.html, Device=STM32F103C8T6, FootprintName=LQFP-48_L7.0-W7.0-P0.50-LS9.0-BL, ManufacturerPart=STM32F103C8T6, ModelId=093be70396ff421eb2cdb946d5311efc聨0819f05c4eef4c71ace90d822a990e87, ModelName=LQFP-48_L7.0-W7.0-H1.4-LS9.0-P0.50, ModelTransform=354.331,354.331,0,0,0,0,0,0,0, Number of I/O=37, Program Memory Type=FLASH, Program Storage Size=64KB, Supplier=LCSC, Supplier Footprint=LQFP-48(7x7), SupplierPart=C8734, Symbol=STM32F103C8T6
U6: "极性:单向;反向截止电压(Vrwm):5V;钳位电压:14V;峰值脉冲电流(Ipp):4A@8/20us;峰值脉冲功率(Ppp):56W@8/20us;击穿电压:6V;", Clamping Voltage=14V, JLCPCB Part Class="Extended Part", Junction Capacitance=0.6pF, LCSC Part Name="单向ESD 5V截止 峰值浪涌电流：4A@8/20us", Manufacturer=BORN(伯恩半导体), Peak Pulse Current (Ipp)=4A@8/20us, Peak Pulse Power Dissipation (Ppp)=56W@8/20us, Reverse Leakage Current (Ir)=100nA, Reverse Stand-Off Voltage (Vrwm)=5V, Voltage - Breakdown=6V, AddInBom=yes, ConvertToPcb=yes, Datasheet=https://item.szlcsc.com/datasheet/TPD2EUSB30DRTR-N/7109362.html, Device=TPD2EUSB30DRTR-N, FootprintName=SOT-723_L1.2-W0.8-P0.40-LS1.2-BR, level of protection="IEC 61000-4-4；IEC 61000-4-5；IEC 61000-4-2", ManufacturerPart=TPD2EUSB30DRTR-N, ModelId=abccde1e67074d7481274a37cf5c97f0聨0819f05c4eef4c71ace90d822a990e87, ModelName=SOT-723-3P_L1.2-W0.8-H0.6-LS1.2-P0.40, ModelTransform=47.244,47.244,0,180,0,0,0,0,0, Polarity=单向, Supplier=LCSC, Supplier Footprint=SOT-9X3, SupplierPart=C6165119, Symbol=TPD2EUSB30DRTR-N, Type=ESD
U7: "应用功能:收发器;USB协议版本:USB 2.0;数据速率:2Mbps;", Current - Supply=7mA, JLCPCB Part Class="Extended Part", LCSC Part Name=USB转串口芯片, Manufacturer=WCH(南京沁恒), Operating Temperature=-20℃~+70℃, Supply Current (Iq)=50uA, Voltage - Supply=3.3V；5V, AddInBom=yes, Applications Function=收发器, ConvertToPcb=yes, Data Rate=2Mbps, Datasheet=https://item.szlcsc.com/datasheet/CH340C/85852.html, Device=CH340C, FootprintName=SOP-16_L10.0-W3.9-P1.27-LS6.0-BL, ManufacturerPart=CH340C, ModelId=3361a6792abf4a8f8fbca4f1924a67ee聨0819f05c4eef4c71ace90d822a990e87, ModelName=SOP-16_L9.9-W3.9-H1.5-LS6.0-P1.27, ModelTransform=240.39054,393.7,0,90,0,0,0,0,0, Supplier=LCSC, Supplier Footprint=SOP-16, SupplierPart=C84681, Symbol=CH340C, USB Protocol="USB 2.0"
U8: "输出极性:正极;工作电压:6V;输出电压:3.3V;输出电流:600mA;电源纹波抑制比(PSRR):65dB@(1kHz);输出类型:固定;", JLCPCB Part Class="Extended Part", LCSC Part Name="3.3V 600mA 6V", Manufacturer=DIODES(美台), Operating Temperature=-40℃~+85℃@(Ta), Output Current=600mA, Output Voltage=3.3V, Power Supply Rejection Ratio (PSRR)=65dB@(1kHz), standby current=55uA, Voltage - Supply=6V, Voltage Dropout=250mV@(600mA), AddInBom=yes, ConvertToPcb=yes, Datasheet=https://item.szlcsc.com/datasheet/AP2112K-3.3TRG1/52131.html, Device=AP2112K-3.3TRG1, Features=使能控制；短路保护；输出放电；过流保护；热关断, FootprintName=SOT-25-5_L2.9-W1.6-P0.95-LS2.8-BL, ManufacturerPart=AP2112K-3.3TRG1, ModelId=c0f94ce67e934acfa3fe33a5b88e2836聨0819f05c4eef4c71ace90d822a990e87, ModelName=SOT-25-5_L2.9-W1.6-P0.95-LS2.8-BL, ModelTransform=114.173,110.236,0,0,0,0,0,0,0, Noise=50uVrms, Number of Outputs=1, Output Configuration=正极, Output Type=固定, Supplier=LCSC, Supplier Footprint=SOT-25-5, SupplierPart=C51118, Symbol=AP2112K-3.3TRG1
USBC1: "连接器类型:Type-C;协议标准:-;公母:母;安装方式:卧贴;触点数量:16P;端口数量:1;额定电流 - 电源:5A;工作温度:-30℃~+80℃;", Current Rating-Power=5A, JLCPCB Part Class="Extended Part", LCSC Part Name="Type-C 母 卧贴", Manufacturer=韩国韩荣, Operating Temperature=-30℃~+80℃, Voltage Rating=20V, AddInBom=yes, Connect-Disconnect Life=1万次, Connector Type=Type-C, ConvertToPcb=yes, Datasheet=https://item.szlcsc.com/datasheet/TYPE-C-31-M-12/177331.html, Device=TYPE-C-31-M-12, FootprintName=USB-C_SMD-TYPE-C-31-M-12_1, Gender=母, Length=7.35mm, ManufacturerPart=TYPE-C-31-M-12, ModelId=2a22bb5af8894b85972aeeacf9cd92d0聨0819f05c4eef4c71ace90d822a990e87, ModelName=USB-C_SMD-TYPE-C-31-M-12_1, ModelTransform=351.9678,311.023,0,180,0,0,0,-43.307,-33.465, Mounting Type=卧贴, Number of Contacts=16P, Number of Ports=1, Protocol Standard=-, Supplier=LCSC, Supplier Footprint=SMD, SupplierPart=C165948, Symbol=TYPE-C-31-M-12
X1: library part XC53G2-8.000-F12NJHP, "晶振类型:贴片晶振;频率:8MHz;常温频差:±10ppm;负载电容:12pF;频率稳定度:±30ppm;", Equivalent Series Resistance(ESR)=80Ω, Frequency Stability=±30ppm, JLCPCB Part Class="Extended Part", LCSC Part Name="5032 2P glass 8MHz 12pF ±10ppm -20℃~+70℃(±30ppm)", Load Capacitance=12pF, Manufacturer=HCI(杭晶), Normal temperature Frequency Tolerance=±10ppm, Operating Temperature=-20℃~+70℃, AddInBom=yes, ConvertToPcb=yes, Datasheet=https://item.szlcsc.com/datasheet/XC53G2-8.000-F12NJHP/3026543.html, Device=XC53G2-8.000-F12NJHP, FootprintName=CRYSTAL-SMD_L5.0-W3.2, ManufacturerPart=XC53G2-8.000-F12NJHP, ModelId=d7c39c66443246ff83c2003c1e1eb6f1聨0819f05c4eef4c71ace90d822a990e87, ModelName=CRYSTAL-SMD_L5.0-W3.2, ModelTransform=196.85,125.984,0,0,0,0,0,0,0, Supplier=LCSC, Supplier Footprint=SMD5032-2P, SupplierPart=C2842269, Symbol=XC53G2-8.000-F12NJHP, Type=贴片晶振

## Free pads (board coordinates)
  round 1.524 hole 2.7 unplated: 1(3.048,3.048) 1(3.175,56.769) 1(56.388,56.769) 1(56.515,3.429)

## Via types
v1: diameter 0.559, hole 0.305, Top Layer to Bottom Layer, tented both sides, 250 vias
v2: diameter 0.6, hole 0.3, Top Layer to Bottom Layer, tented both sides, 10 vias
v3: diameter 0.5, hole 0.3, Top Layer to Bottom Layer, tented both sides, 5 vias

## Nets (pads, with @x,y where several pads share a name; then routed paths per layer and width w, separated by ;. In a path a pad name is that pad's centre, name@x,y a point inside that pad or via, vN(x,y) a via of type N, cw(c..) or ccw(c..) an arc to the next point about the centre after c; other vN are vias at no path point)
3.3V: 3V3.1 BOOT0.1 C1.2 C2.1 C5.1 C9.2 C12.2 C13.2 C14.2 C16.1 C17.1 GPIO.1 GPIO.3 I2C1.1 R4.2 R5.1 R18.2 R19.2 R20.2 SWD.1 U1.1 U1.24 U1.36 U1.48 U7.4 U7.16 U8.5 | length 203.4
  Top Layer w0.254: C9.2@27.01,26.528 U1.24 ; U1.36 35.9,23.867 36.399,23.368 C5.1 ; U1.1@35.9,32.934 35.9,32.913 36.784,32.029 U1.48 38.832,32.029 C2.1 C2.1@38.859,32.001
  Top Layer w0.381: 3.521,23.495 GPIO.3 9.083,19.619 14.158,19.619 ; C12.2@14.158,13.462 14.158,19.619 ; C12.2 U7.4 ; v1(20.066,31.877) 20.066,27.559 22.005,25.62 ; 21.936,25.55 21.783,25.397 21.783,19.619 ; U7.16 C14.2@23.666,17.272 ; 22.098,25.527 26.787,25.527 27.01,25.75 C9.2@27.01,26.528 ; C14.2@23.727,17.355 23.727,17.675 21.783,19.619 ; C14.2@23.738,17.344 C14.2 ; C13.2 23.97,14.257 23.97,17.112 C14.2 ; v1(28.194,39.751) 28.228,39.785 30.016,39.785 R5.1 ; U1.1@35.9,32.934 U1.1 35.9,34.032 36.158,34.29 41.021,34.29 47.371,40.64 47.371,47.498 49.022,49.149 BOOT0.1 ; C5.1 38.051,23.368 ; C1.2@38.838,24.154 v2(38.838,25.423) ; C2.1@38.859,32.001 38.859,31.118 v2(38.862,31.115) ; 40.386,19.431 32.131,19.431 31.496,18.796 25.538,18.796 23.937,17.195 C14.2 ; R18.2 47.887,7.62 51.593,7.62 51.816,7.843 51.816,10.541 ; C17.1 51.369,12.258 51.816,11.811 ; R20.2 53.226,18.415 54.369,19.558 57.912,19.558 ; R19.2 53.205,13.716 52.197,13.716 51.816,13.335 51.816,11.811 ; SWD.1 56.896,25.273 57.912,24.257 57.912,19.558 ; 14.158,19.619 21.783,19.619 ; 51.816,10.541 52.451,9.906 55.753,9.906 I2C1.1 57.912,12.065 57.912,19.558 ; 51.816,10.541 51.816,11.811
  Top Layer w0.508: C1.2@38.838,24.154 38.838,24.056 38.716,23.934 38.618,23.934 38.051,23.368 38.608,22.811 38.608,21.209 40.386,19.431 42.735,17.081 ; R4.2 43.66,18.814 42.735,17.889 42.735,17.081 ; 3V3.1 47.815,16.32 49.212,16.32 49.955,15.577 49.955,13.672 50.038,13.589 ; 49.751,13.876 45.941,13.876 42.735,17.081 ; 50.038,13.018 50.038,13.589 ; C17.1 50.419,12.512 50.419,13.589 50.038,13.589
  Bottom Layer w0.381: v1(20.066,31.877) 27.906,39.717 28.16,39.717 v1(28.194,39.751) ; v2(38.838,25.423) 38.838,31.086 38.862,31.11 v2(38.862,31.115)
+5V_SYS: 5V_SYS.1 C15.1 GPIO.10 R17.1 SW:POWER.2 U8.1 | length 49.2
  Top Layer w0.381: GPIO.10 17.272,21.59 v1(21.082,21.59) ; v1(26.67,17.907) 26.67,16.637 28.829,14.478 32.893,14.478 ; 5V_SYS.1 33.147,14.732 32.893,14.478 ; C15.1 42.847,12.192 43.035,12.38 U8.1 ; R17.1 41.138,6.487 38.989,8.636 SW:POWER.2 32.893,8.89 32.893,14.478
  Bottom Layer w0.381: v1(21.082,21.59) 26.447,21.59 26.67,21.367 v1(26.67,17.907)
ADC12_IN0: C10.2 D3.3 R10.1 TP_ADC1.1 U1.10 | length 39.9
  Top Layer w0.152: U1.10 31.38,33.55 31.38,35.041 31.204,35.217 29.553,35.217 26.035,38.735 26.035,42.926 26.67,43.561 30.099,43.561 30.734,44.196 30.734,46.355 31.242,46.863 32.639,46.863 34.036,45.466 37.55,45.466 37.931,45.085 D3.3 39.512,45.874 42.357,48.718 C10.2 ; R10.1 43.688,50.148 42.357,48.818 C10.2 ; TP_ADC1.1 43.053,48.768 C10.2
ADC12_IN1: C11.2 D4.3 R11.1 TP_ADC2.1 U1.11 | length 28.1
  Top Layer w0.152: U1.11 30.902,34.376 30.48,34.798 29.083,34.798 25.527,38.354 25.527,43.561 26.924,44.958 D4.3 29.718,47.001 31.562,48.845 C11.2 ; R11.1 33.157,51.026 31.615,49.484 31.615,48.948 C11.2 ; TP_ADC2.1 33.02,48.895 C11.2
GATE1: Q1.1 R1.2 R3.2 TP_GATE1.1 | length 6.3
  Top Layer w0.152: Q1.1 9.718,43.5 R1.2 ; TP_GATE1.1 R1.2 ; R3.2 R1.2
GATE2: Q2.1 R6.2 R7.2 TP_GATE2.1 | length 5.9
  Top Layer w0.152: Q2.1 R6.2@9.915,33.213 ; R6.2@9.877,33.456 R6.2@9.906,33.426 ; TP_GATE2.1 R6.2@9.915,33.213 ; R6.2@9.978,33.219 R6.2@10.033,33.274 ; R7.2@11.647,33.329 R7.2 R6.2 9.915,33.283 R6.2@9.915,33.213
GND: ADC1.2 ADC2.2 BOOT0.3 C1.1 C2.2 C3.1 C4.1 C5.2 C6.1 C7.1 C8.1 C9.1 C10.1 C11.1 C12.1 C13.1 C14.1 C15.2 C16.2 C17.2 C18.1 D3.1 D4.1 D5.2 GPIO.2 GPIO.4 H6.1 I2C1.2 LED:PWR.2 MOS1.3 MOS2.3 Q1.2 Q2.2 R2.2 R3.1 R7.1 R12.2 R13.2 R14.1 R15.1 R16.1 R21.1 SPI1.1 SW:RESET.1 SW:USER.2 SWD.5 TP_GND1.1 U1.8 U1.23 U1.35 U1.47 U6.3 U7.1 U7.15 U8.2 USBC1.A1B12 USBC1.B1A12 | length 81.8
  Top Layer w0.254: v1(32.258,32.385) 32.258,32.467 32.397,32.607 32.397,33.525 U1.8 ; v1(35.179,23.749) 35.179,23.831 35.397,24.05 35.397,25.026 U1.35
  Top Layer w0.381: v1(2.286,17.907) 2.334,17.907 2.588,17.653 C18.1 3.937,17.668 v1(3.937,19.177) ; v1(6.731,45.339) 7.526,45.339 Q1.2 ; USBC1.B1A12 7.396,8.357 7.942,7.811 v1(7.942,7.806) ; v1(7.046,14.757) v1(8.103,14.757) ; v1(7.587,44.671) Q1.2 ; v1(7.729,34.435) Q2.2 ; v1@7.747,35.814 v1(7.729,35.796) Q2.2 ; v1@8.509,45.291 v1(8.509,45.339) 8.479,45.369 7.617,45.369 Q1.2 ; v1(8.636,35.052) 7.79,35.052 Q2.2 ; U6.3@10.039,11.557 v1(10.541,11.557) ; v1(10.16,16.51) 10.143,16.527 10.143,17.636 R15.1 10.254,17.78 v1(11.557,17.78) ; R14.1@10.414,13.843 v1(10.414,14.478) ; R16.1 v1(12.446,9.525) ; v1(11.303,13.589) 11.866,13.589 v1@11.948,13.507 ; R7.1 v1(12.827,34.798) ; R3.1 v1(13.19,45.067) v1@13.208,45.085 ; v1(11.948,13.589) 11.982,13.555 12.668,13.555 C12.1 12.761,14.496 12.7,14.557 v1(12.7,14.605) ; v1(14.859,1.397) D5.2 v1(16.241,2.936) v1@16.256,2.921 ; U7.1 v1(17.78,17.272) ; v1(20.32,16.002) U7.15 ; v1(22.479,52.07) 22.527,52.07 22.654,52.197 SW:RESET.1 ; v1(22.606,28.575) R21.1 ; v1(24.003,11.661) C13.1 24.006,12.824 v1(25.143,12.824) ; v1(24.257,26.67) C9.1 ; v1(24.747,48.895) C6.1 v1(25.908,50.038) ; v1(25.339,15.984) C14.1 ; U1.23 30.33,27.028 v1(30.353,27.051) ; v1(28.956,38.1) C8.1 ; v1(28.999,48.895) C11.1 30.16,49.929 30.099,49.99 v1(30.099,50.038) ; v1(29.464,36.449) 29.512,36.449 29.639,36.322 C7.1 ; v1@31.623,42.654 v1(31.623,42.672) D4.1@31.623,43.815 ; v1(31.75,52.832) R13.2 ; v1(36.007,41.161) C4.1 v1(36.703,40.259) ; v1(36.195,31.496) v1@36.218,31.473 ; v1(36.449,20.701) C5.2 v1(37.714,21.966) ; v1(37.592,40.259) C3.1 38.415,41.166 38.354,41.227 v1(38.354,41.275) ; v1(39.794,48.768) C10.1 40.955,49.797 41.021,49.863 v1(41.021,49.911) ; v1(40.259,25.019) 40.264,25.014 C1.1 ; C2.2 v1(41.42,32.004) ; v1(40.264,22.969) C1.1 ; v1(40.513,10.795) 40.516,10.792 41.653,10.792 C15.2 41.788,10.922 42.164,10.922 v1(42.358,11.116) 42.551,11.309 43.156,11.309 U8.2 ; v1(40.63,53.975) R12.2 ; v1(41.275,24.13) C1.1 ; D3.1 42.992,44.135 v1(43.053,44.196) ; LED:PWR.2 44.282,2.454 v1(44.366,2.37) v1@44.45,2.286 ; R2.2 v1(46.964,30.282) ; v1(47.752,9.779) C16.2 47.802,10.856 48.729,9.929 49.188,9.929 50.115,10.856 C17.2 v1(50.165,9.652) ; v1(50.165,22.987) TP_GND1.1 ; SW:USER.2 51.392,45.872 51.816,46.297 v1(51.816,46.863) ; v1(51.435,21.717) TP_GND1.1 ; v1(51.435,24.257) TP_GND1.1 ; v1(52.959,22.987) TP_GND1.1
  other v1: 23.368,1.143 19.939,1.397 40.64,2.794 38.354,2.921 7.493,3.048 19.431,3.048 23.368,3.302 49.911,4.191 51.054,4.191 40.259,5.334 49.911,5.334 51.054,5.334 38.354,5.461 6.35,5.715 0.762,6.223 53.467,6.858 44.45,7.239 45.847,7.366 13.335,8.128 44.577,8.636 45.593,8.636 40.894,9.017 58.293,9.017 24.511,9.398 25.654,9.398 19.685,9.652 39.497,9.779 18.288,9.906 48.514,9.906 49.403,9.906 14.478,10.287 29.337,10.414 24.511,10.541 25.654,10.541 49.022,10.541 49.022,11.176 34.544,11.303 19.812,12.319 18.288,12.7 30.607,12.7 19.812,14.732 18.415,14.859 37.846,15.621 39.878,15.621 16.002,17.018 38.1,17.526 39.624,17.526 51.562,17.78 16.256,18.034 19.558,18.161 7.112,19.177 37.846,20.574 33.02,20.701 34.671,20.828 3.556,20.955 4.826,20.955 48.26,21.082 33.909,21.59 34.163,22.479 57.023,23.495 58.801,24.892 47.117,26.797 22.606,26.924 34.925,27.178 54.991,27.178 32.766,27.305 0.889,27.813 3.175,27.94 26.924,27.94 31.496,28.575 34.036,28.575 21.209,29.21 18.161,29.464 48.768,29.591 50.546,29.718 6.985,29.845 3.175,30.099 1.27,30.226 55.499,30.226 31.242,30.48 32.258,30.48 33.401,30.48 34.798,30.607 14.478,31.242 15.621,31.242 48.652,31.245 50.419,31.369 58.674,31.369 52.832,31.877 54.991,31.877 14.478,32.385 15.621,32.385 18.415,32.385 42.418,33.02 53.086,33.655 55.118,33.655 43.688,34.163 16.129,35.433 58.801,36.195 44.577,36.703 51.054,36.957 49.022,37.084 17.145,37.211 45.847,37.846 42.672,38.735 52.959,39.116 16.891,39.37 50.673,39.37 47.625,39.497 55.753,40.513 58.674,40.513 26.924,40.767 55.753,41.656 57.404,41.656 44.831,41.91 58.674,41.91 23.495,42.164 42.037,42.418 27.305,42.545 29.083,42.545 48.514,42.799 13.716,42.926 34.29,43.053 38.735,43.053 36.322,43.18 45.466,44.45 23.495,44.831 26.035,45.974 28.702,46.101 48.514,46.609 19.05,46.736 45.72,46.736 13.462,47.244 22.733,47.498 54.229,47.752 58.674,48.387 19.05,48.895 13.462,49.657 22.606,50.038 47.371,50.927 19.177,51.181 51.308,51.562 52.451,51.562 13.462,51.816 51.308,52.705 52.451,52.705 5.461,52.832 58.293,52.832 1.397,52.959 19.05,53.848 10.922,53.975 30.099,54.483 50.419,54.483 7.239,54.61 52.07,55.118 51.943,56.642 31.369,57.531 32.766,58.928 40.894,58.928 42.926,58.928 51.943,59.055
I2C1_SCL: I2C1.3 R19.1 U1.42 | length 30.8
  Top Layer w0.152: U1.42 42.471,29.03 46.863,24.638 46.863,20.32 52.07,15.113 I2C1.3 55.88,14.841 53.241,12.202 R19.1
I2C1_SDA: I2C1.4 R20.1 U1.43 | length 26.6
  Top Layer w0.152: U1.43 42.733,29.53 47.371,24.892 47.371,20.447 50.909,16.909 R20.1 53.226,16.909 53.97,17.653 I2C1.4
LED_USER: LED:USER.2 U1.41 | length 11.1
  Top Layer w0.152: U1.41 42.083,28.529 44.831,25.781 44.831,25.4 43.728,24.297 43.728,23.749 LED:USER.2
MCU_RX: U1.31 U7.2 | length 22.4
  Top Layer w0.152: U7.2 18.669,16.002 20.955,18.288 21.914,18.288 v1(21.942,18.259) ; v1(23.495,19.431) 30.353,19.431 33.401,22.479 U1.31
  Bottom Layer w0.152: v1(21.942,18.259) 22.006,18.259 23.05,19.304 23.258,19.304 23.385,19.431 v1(23.495,19.431)
MCU_TX: U1.30 U7.3 | length 26.5
  Top Layer w0.152: U7.3 15.884,14.732 15.696,14.92 15.696,15.24 14.859,16.077 14.859,18.161 15.494,18.796 21.494,18.796 v1(21.552,18.854) ; v1(22.987,20.066) 30.099,20.066 32.901,22.868 U1.30
  Bottom Layer w0.152: v1(21.552,18.854) 21.63,18.932 21.98,18.932 22.717,19.669 22.717,19.686 22.987,19.956 v1(22.987,20.066)
MOS_CTRL1: R1.1 U1.18 | length 30.8
  Top Layer w0.152: R1.1 9.779,45.847 10.16,46.228 14.224,46.228 14.478,45.974 14.478,43.815 18.161,40.132 18.161,35.687 22.479,31.369 25.654,31.369 27.493,29.53 U1.18
MOS_CTRL2: R6.1 U1.19 | length 23.3
  Top Layer w0.152: R6.1 9.906,35.814 10.541,36.449 16.383,36.449 22.098,30.734 25.72,30.734 27.424,29.03 U1.19
MOS_OUT1: D1.2 MOS1.2 Q1.3 TP_OUT1.1 | length 14.1
  Top Layer w0.508: MOS1.2 5.009,44.521 5.517,44.521 Q1.3 5.588,46.438 5.886,46.736 8.636,46.736 8.995,47.095 8.995,47.563 D1.2 10.287,48.936 TP_OUT1.1
MOS_OUT2: D2.2 MOS2.2 Q2.3 TP_OUT2.1 | length 14.2
  Top Layer w0.508: MOS2.2 4.755,34.234 5.659,34.234 Q2.3 5.73,35.829 6.477,36.576 8.128,36.576 D2.2 TP_OUT2.1
NetC3_2: C3.2 U1.5 X1.1 | length 11.9
  Top Layer w0.152: U1.5 33.901,34.79 34.036,34.925 38.735,34.925 39.21,35.4 X1.1 39.817,37.829 C3.2
NetC4_2: C4.2 U1.6 X1.2 | length 7.6
  Top Layer w0.152: U1.6 33.401,35.262 35.11,36.971 35.11,37.096 34.666,37.54 C4.2@34.666,40.259
NetH2_2: BOOT0.2 R2.1 U1.44 | length 32.5
  Top Layer w0.152: U1.44 44.043,30.028 R2.1 44.297,31.47 45.212,32.385 50.8,32.385 51.308,32.893 51.308,34.805 v2(51.319,34.816) ; v1(51.308,36.068) 54.483,39.243 54.483,45.339 55.753,46.609 BOOT0.2
  Bottom Layer w0.152: v1(51.308,36.068) 51.319,36.057 v2(51.319,34.816)